# Altium PCB BattPro_InLine.PcbDoc
Units mm, origin at the board's own origin, x right, y up, seen from the top; angles counter-clockwise.
Board outline 14.23 x 11.18 mm, 2 copper layers (Top Layer, Bottom Layer); 5 components, 7 nets, 24 pads, 0 vias.
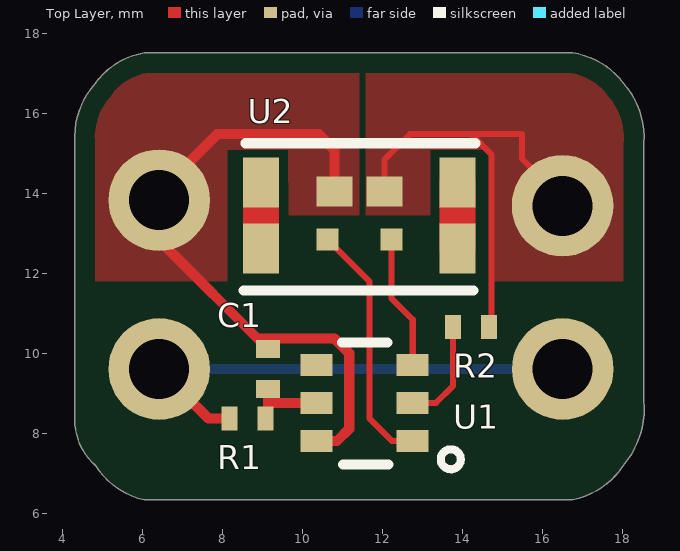
[diagram p0: Top Layer view]
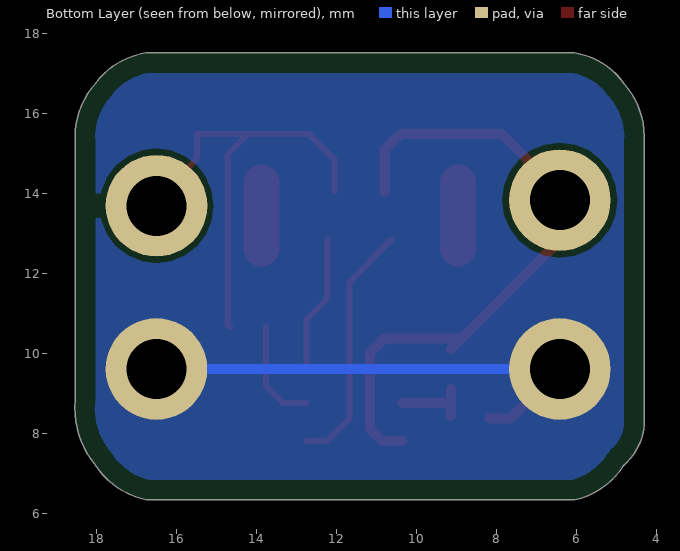
[diagram p1: Bottom Layer view, seen from below]
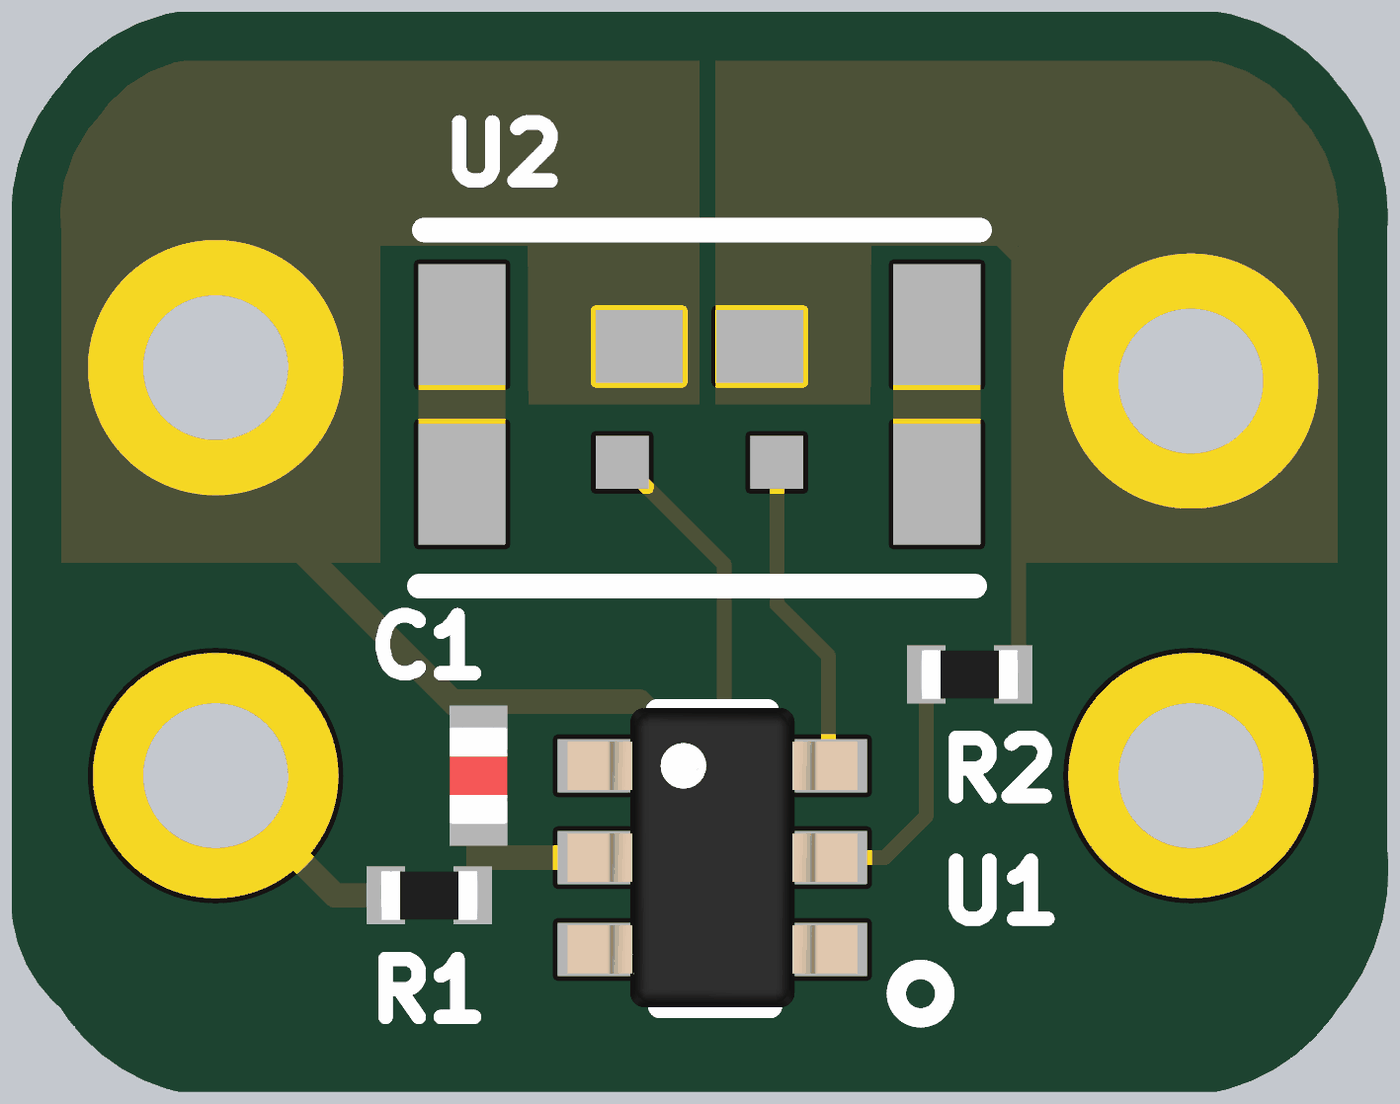
[diagram p2: 3D render of the assembled board from above, using the file's embedded part models]

## Layer stack, top to bottom
Top Solder: solder mask 0.0102, Solder Resist, Dk 3.5
Top Layer: signal copper 0.0356
Dielectric 1: dielectric 0.32, FR-4, Dk 4.8
Bottom Layer: signal copper 0.0356
Bottom Solder: solder mask 0.0102, Solder Resist, Dk 3.5

## Board outline
4.318,15.284 cw(c6.359,15.411) 4.826,16.764 cw(c6.359,15.665) 6.052,17.526 16.764,17.526 cw(c16.482,15.616) 18.034,16.764 cw(c16.502,15.411) 18.542,15.284 18.542,8.846 cw(c16.322,8.645) 18.034,7.217 cw(c16.352,8.316) 16.764,6.35 6.052,6.35 cw(c6.486,8.264) 4.826,7.217 cw(c5.798,8.338) 4.318,8.233

## Design rules (kind name [scope] priority, off if disabled: settings)
AssemblyTestPointUsage [All] p1 off:
AssemblyTestpoint [All] p1 off: testpointundercomponent=TRUE minsize=1.016 maxsize=2.54 preferedsize=1.524 minholesize=0 maxholesize=1.016 preferedholesize=0.813 testpointgrid=0.025 usegrid=TRUE gridtolerance=0 allowsidetop=TRUE allowsidebottom=TRUE
BoardOutlineClearance [All] p1: gap=0.5 ignorepadtopadclearanceinfootprint=FALSE
Clearance Component_Clearance [IsComponent vs IsComponent] p1: gap=0.254 ignorepadtopadclearanceinfootprint=FALSE
Clearance [All] p2: gap=0.152 ignorepadtopadclearanceinfootprint=TRUE
FabricationTestPointUsage [All] p1 off: valid=0 allowmultiple=FALSE
FabricationTestpoint [All] p1 off: side=3 testpointundercomponent=FALSE minsize=1.016 maxsize=2.54 preferedsize=1.524 minholesize=0 maxholesize=1.016 preferedholesize=0.813 testpointgrid=0.025 allowsidetop=TRUE allowsidebottom=TRUE usegrid=TRUE gridtolerance=0
HoleSize [All] p1: absolutevalues=TRUE maxlimit=6.3 minlimit=0.3 maxpercent=80.000 minpercent=20.000
HoleToHoleClearance [All] p1: gap=0.2 allowstackedmicrovias=FALSE
MinimumAnnularRing [All] p1: minimumring=0.15
MinimumSolderMaskSliver [All] p1: minsoldermaskwidth=0.1
PlaneClearance [All] p1: clearance=0.381
PlaneConnect [All] p1: planeconnectstyle=Direct reliefexpansion=0.508 reliefentries=4 reliefconductorwidth=0.254 reliefairgap=0.254
PolygonConnect [All] p1: connectstyle=Direct reliefconductorwidth=0.254 reliefentries=4 polygonreliefangle="90 Angle" airgapwidth=0.254
RoutingVias [All] p1: holewidth=0.3 width=0.6 viastyle="Through Hole" minholewidth=0.2 minwidth=0.6 maxholewidth=6.3 maxwidth=10 useviatemplates=TRUE viatemplateguid#1={BD608B56-3823-4E73-827C-44B7F876FFD7} viatemplatename#1=v60h30m0mx0(Tol8-8)
SilkToSilkClearance [All] p1: silktosilkclearance=0
SilkToSolderMaskClearance [IsPad] p1: minsilkscreentomaskgap=0.2 clearancetoexposedcopper=TRUE
SolderMaskExpansion [All] p1: expansion=0.051
UnConnectedPin [All] p1:
UnRoutedNet [All] p1: checkbadconnections=TRUE
Width [All] p1: maxlimit=25.4 minlimit=0.152 preferedwidth=0.2
18 further rules are at their usual default settings.

## Components (designator, comment, footprint, x,y, rotation, side; value= is the part's Value field where it differs from the comment)
C1 "100nF" CAP0402R 9.144,9.621 r270 top value=0.1uF
R1 "330Ohms" RES0402R 8.636,8.382 r0 top value=1K
R2 "2.7K" RES0402R 14.224,10.668 r180 top value=1K
U1 "AP9101C-COTRG" SOT-26 11.684,8.636 r270 top
U2 "IRL6297SDPbF" IRL6297SDPbF 11.43,13.462 r0 top

## Footprints (in the part's own frame and the unit in brackets; to place one, negate y for a bottom-side part, rotate by r counter-clockwise, add the part's x,y. Pads: shape width x height; smd on the part's side, far side on the other; paste and mask are expansions set on the pad)
CAP0402R [mm] "Capacitor 0402 reflow soldering"
  rect 0.45x0.6 smd mask+0: 1(-0.5,0) 2(0.5,0)
  body extent -0.5,-0.3 0.5,0.3, height 0.2
IRL6297SDPbF [mm] "Dual N-Channel Power MOSFET for Charge and Discharge Switching"
  rect 0.55x0.55 smd: 1(-0.8,-0.6) 4(0.8,-0.6)
  rect 0.9x0.75 smd: 2(-0.625,0.6) 5(0.625,0.6)
  rect 0.9x1.25 smd: 3(-2.455,-0.825) 3(-2.455,0.825) 6(2.455,-0.825) 6(2.455,0.825)
  silkscreen extent -2.9,-1.88 2.9,1.8, body extent -2.41,-1.78 2.49,1.78, height 0.7
RES0402R [mm] "resistor 0402 reflow soldering"
  rect 0.4x0.6 smd mask+0: 1(-0.45,0) 2(0.45,0)
  body extent -0.5,-0.25 0.5,0.25, height 0.3
SOT-26 [mm]
  rect 0.55x0.8 smd: 1(0.813,1.079) 2(-0.137,1.079) 3(-1.087,1.079) 4(-1.087,-1.321) 5(-0.137,-1.321) 6(0.813,-1.321)
  silkscreen extent -1.65,-0.69 1.52,2.28, body extent -1.69,-1.62 1.41,1.38, height 1.4

## Part data
C1: library part Capacitor, "SMT Capacitor", Case/Package=0805, Case Code (Metric)=2012, Dielectric=X7R, Insulation Resistance=100GR, Manufacturer=Yageo, Manufacturer Part Number=CC0805KRX7R8BB104, Max Operating Temperature=125°C, Min Operating Temperature=-55°C, Package Quantity=1, Supplier Part Number 1=311-1141-6-ND, Tolerance=10%, Voltage Rating=25V, Capacitance=100nF, Case Code (Imperial)=0805, ComponentLink1Description=http://www.yageo.com/documents/recent/UPY-GPHC_X7R_6.3V-to-50V_18.pdf?src-supplier=Digi-Key, ComponentLink1URL=http://www.yageo.com/documents/recent/UPY-GPHC_X7R_6.3V-to-50V_18.pdf?src-supplier=Digi-Key, ComponentLink2Description=http://www.farnell.com/datasheets/1489800.pdf?src-supplier=Element14, ComponentLink2URL=http://www.farnell.com/datasheets/1489800.pdf?src-supplier=Element14, ComponentLink3Description=http://www.farnell.com/datasheets/1850775.pdf?src-supplier=Element14, ComponentLink3URL=http://www.farnell.com/datasheets/1850775.pdf?src-supplier=Element14, ComponentLink4Description=https://www.verical.com/server-webapp/html/getDatasheet?partID=330244&src-supplier=Verical, ComponentLink4URL=https://www.verical.com/server-webapp/html/getDatasheet?partID=330244&src-supplier=Verical, ComponentLink5Description=http://www.yageo.com/documents/recent/UPY-GPHC_X7R_6.3V-to-50V_8.pdf?src-supplier=Avnet+Europe, ComponentLink5URL=http://www.yageo.com/documents/recent/UPY-GPHC_X7R_6.3V-to-50V_8.pdf?src-supplier=Avnet+Europe, ComponentLink6Description=http://www.farnell.com/datasheets/1784427.pdf?src-supplier=Element14, ComponentLink6URL=http://www.farnell.com/datasheets/1784427.pdf?src-supplier=Element14, ComponentLink7Description=http://www.farnell.com/datasheets/70765.pdf?src-supplier=Element14, ComponentLink7URL=http://www.farnell.com/datasheets/70765.pdf?src-supplier=Element14, Composition=Ceramic, Depth=1.25mm, Halogen Free="Halogen Free", Height=0.85mm, Lead Free="Lead Free", Length=2mm, Material=Ceramic, Mount="Surface Mount", Number of Pins=2, Packaging="Tape and Reel", Pricing 1="1=0.13, 10=0.092, 100=0.0433, 500=0.0304, 1000=0.02516 (USD)", Radiation Hardening=No, REACH SVHC="No SVHC", Stock 1=1166693, Supplier 1=Digi-Key, Termination=SMD/SMT, Thickness=0.033inch, Voltage Rating (DC)=25V, Width=0.049inch
R1: library part Resistor, "SMT Resistor", Case/Package=2512, Case Code (Metric)=6432, Manufacturer="Vishay Dale", Manufacturer Part Number=CRCW2512330RJNEG, Max Operating Temperature=155°C, Max Power Dissipation=1W, Min Operating Temperature=-55°C, Package Quantity=1, Resistance=330R, Supplier Part Number 1=541-330XDKR-ND, Temperature Coefficient=200ppm/°C, Tolerance=5%, Voltage Rating=500V, Case Code (Imperial)=2512, ComponentLink1Description=http://www.vishay.com/docs/20035/dcrcwe3.pdf?src-supplier=Digi-Key, ComponentLink1URL=http://www.vishay.com/docs/20035/dcrcwe3.pdf?src-supplier=Digi-Key, ComponentLink2Description=http://www.vishay.com/docs/20035/dcrcwe3.pdf?src-supplier=Avnet, ComponentLink2URL=http://www.vishay.com/docs/20035/dcrcwe3.pdf?src-supplier=Avnet, ComponentLink3Description=https://www.alliedelec.com/m/d/0c934d6939ccefa68dbe0b96d821c8cf.pdf?src-supplier=Allied+Electronics, ComponentLink3URL=https://www.alliedelec.com/m/d/0c934d6939ccefa68dbe0b96d821c8cf.pdf?src-supplier=Allied+Electronics, ComponentLink4Description=http://www.vishay.com/docs/20035/dcrcwe3.pdf?src-supplier=Future+Electronics, ComponentLink4URL=http://www.vishay.com/docs/20035/dcrcwe3.pdf?src-supplier=Future+Electronics, ComponentLink5Description=http://www.farnell.com/datasheets/1847332.pdf?src-supplier=Element14, ComponentLink5URL=http://www.farnell.com/datasheets/1847332.pdf?src-supplier=Element14, ComponentLink6Description=http://www.mouser.com/ds/2/427/dcrcwe3-109170.pdf?src-supplier=Mouser, ComponentLink6URL=http://www.mouser.com/ds/2/427/dcrcwe3-109170.pdf?src-supplier=Mouser, Composition="Thick Film", Contact Plating=Tin, Depth=3.15mm, Features="Automotive AEC-Q200", Height=0.6mm, Lead Free="Lead Free", Length=6.3mm, Military Standard=Not, Mount="Surface Mount", Number of Pins=2, Number of Terminations=2, Packaging="Tape and Reel", Power Rating=1W, Pricing 1="1=0.38, 10=0.318, 100=0.1242, 1000=0.05198 (USD)", Radiation Hardening=No, REACH SVHC=Unknown, Stock 1=42562, Supplier 1=Digi-Key, Termination=Solder, Voltage Rating (DC)=500V, Weight=0.001429oz, Width=0.124inch
R2: library part Resistor, "SMT Resistor", Case/Package=2512, Case Code (Metric)=6432, Manufacturer="Vishay Dale", Manufacturer Part Number=CRCW25122K70JNEG, Max Operating Temperature=155°C, Max Power Dissipation=1W, Min Operating Temperature=-55°C, Package Quantity=2000, Resistance=2.7kR, Supplier Part Number 1=541-2.7KXDKR-ND, Temperature Coefficient=200ppm/°C, Tolerance=5%, Voltage Rating=500V, Case Code (Imperial)=2512, ComponentLink1Description=http://www.mouser.com/ds/2/427/dcrcwe3-109170.pdf?src-supplier=Mouser, ComponentLink1URL=http://www.mouser.com/ds/2/427/dcrcwe3-109170.pdf?src-supplier=Mouser, ComponentLink2Description=http://www.vishay.com/docs/20035/dcrcwe3.pdf?src-supplier=Avnet, ComponentLink2URL=http://www.vishay.com/docs/20035/dcrcwe3.pdf?src-supplier=Avnet, ComponentLink3Description=http://www.farnell.com/datasheets/2045674.pdf?src-supplier=Element14, ComponentLink3URL=http://www.farnell.com/datasheets/2045674.pdf?src-supplier=Element14, ComponentLink4Description=http://www.vishay.com/docs/20035/dcrcwe3.pdf?src-supplier=Digi-Key, ComponentLink4URL=http://www.vishay.com/docs/20035/dcrcwe3.pdf?src-supplier=Digi-Key, Composition="Thick Film", Contact Plating=Tin, Depth=3.15mm, Features="Automotive AEC-Q200", Height=0.028inch, Height - Seated (Max)=0.022inch, Lead Free="Lead Free", Length=6.3mm, Military Standard=Not, Number of Pins=2, Number of Terminations=2, Packaging="Tape and Reel", Power Rating=1W, Pricing 1="1=0.38, 10=0.318, 100=0.1242, 1000=0.05198 (USD)", Pricing 2="1=0.25, 10=0.211, 25=0.1532, 50=0.111, 100=0.0823, 250=0.06316, 500=0.04976, 1000=0.03445 (USD)", Radiation Hardening=No, REACH SVHC=Unknown, Stock 1=6589, Stock 2=1266, Supplier 1=Digi-Key, Supplier 2=Digi-Key, Supplier Part Number 2=P20019CT-ND, Termination=SMD/SMT, Voltage Rating (DC)=500V, Weight=0.001429oz, Width=3.15mm
U1: "Battery Protection IC"
U2: Supplier Part Number 1=IRL6297SDTRPBF-ND, Supplier 1=Digi-Key

## Free pads (board coordinates)
  round 2.54 hole 1.5: 9(6.426,9.621) 9(6.426,13.843) 9(16.51,13.703) 9(16.513,9.621)

## Nets (pads, with @x,y where several pads share a name; then routed paths per layer and width w, separated by ;. In a path a pad name is that pad's centre, name@x,y a point inside that pad or via, vN(x,y) a via of type N, cw(c..) or ccw(c..) an arc to the next point about the centre after c; other vN are vias at no path point)
+PACK: pad.9@6.426,9.621 pad.9@16.513,9.621 R1.1 | length 12.4
  Top Layer w0.254: pad.9@6.426,9.621 7.666,8.382 R1.1
  Bottom Layer w0.254: pad.9@6.35,9.621 6.426,9.621 pad.9@16.51,9.621
-PACK: C1.1 pad.9@6.426,13.843 U1.6 U2.2 | length 16.4
  Top Layer w0.254: pad.9@6.325,13.945 7.874,15.494 10.414,15.494 10.805,15.103 U2.2 ; pad.9@6.426,13.843 6.426,12.839 C1.1 ; 8.89,10.389 10.805,10.389 11.176,10.018 11.176,8.128 10.871,7.823 U1.6
C_GATE: U1.3 U2.4 | length 3.4
  Top Layer w0.152: U2.4 12.23,11.392 12.763,10.859 U1.3
D_GATE: U1.1 U2.1 | length 6.2
  Top Layer w0.152: U2.1 11.684,11.808 11.684,8.382 12.243,7.823 U1.1
GND: pad.9@16.51,13.703 R2.1 U2.5 | length 11.5
  Top Layer w0.152: U2.5 12.055,14.849 12.7,15.494 14.224,15.494 ; R2.1 14.732,10.726 14.732,14.986 14.224,15.494 ; pad.9@16.408,13.97 15.494,14.884 15.494,15.494 14.224,15.494
VDD: C1.2 R1.2 U1.5 | length 1.9
  Top Layer w0.254: R1.2@9.144,8.447 9.144,8.773 ; C1.2 9.144,8.773 ; U1.5 9.144,8.773
VM: R2.2 U1.2 | length 2.7
  Top Layer w0.152: U1.2 13.345,8.773 13.774,9.202 R2.2
pads on no net: U1.4 U2.3 U2.6
copper on no net: | length 3.3
  Top Layer w0.9: 8.975,12.637 8.975,14.287 ; 13.885,12.637 13.885,14.287

## Polygon pours and split planes (outlines as drawn)
+PACK on Bottom Layer "Bottom Layer-+PACK" (solid, remove dead copper, pour order 12): 3.556,17.78 19.812,17.78 19.812,6.35 3.556,6.35
GND on Top Layer "Top Layer-GND" (solid, remove dead copper, pour order 16): 11.43,13.462 11.43,17.78 19.304,17.78 19.304,11.821 14.732,11.821 14.732,15.103 13.206,15.103 13.199,13.462
-PACK on Top Layer "Top Layer--PACK" (solid, remove dead copper, pour order 14): 11.43,13.462 11.43,17.78 3.556,17.78 3.556,11.821 8.128,11.821 8.128,15.103 9.654,15.103 9.661,13.462

## Silkscreen, mask and mechanical layers (free items; w line width, h text height)
Route Tool Path:
  the board outline again, w0.254